# Altium PCB drac_v3_panel.PcbDoc
Units mm, origin at the board's own origin, x right, y up, seen from the top; angles counter-clockwise.
Board outline 192 x 259.5 mm, 6 copper layers (Top Layer, Mid Layer 1_gnd, Mid Layer 2, Mid Layer 3, Mid Layer 4_gnd, Bottom Layer), stack 1.597 mm thick; 17 components, 0 nets, 93 pads, 0 vias.
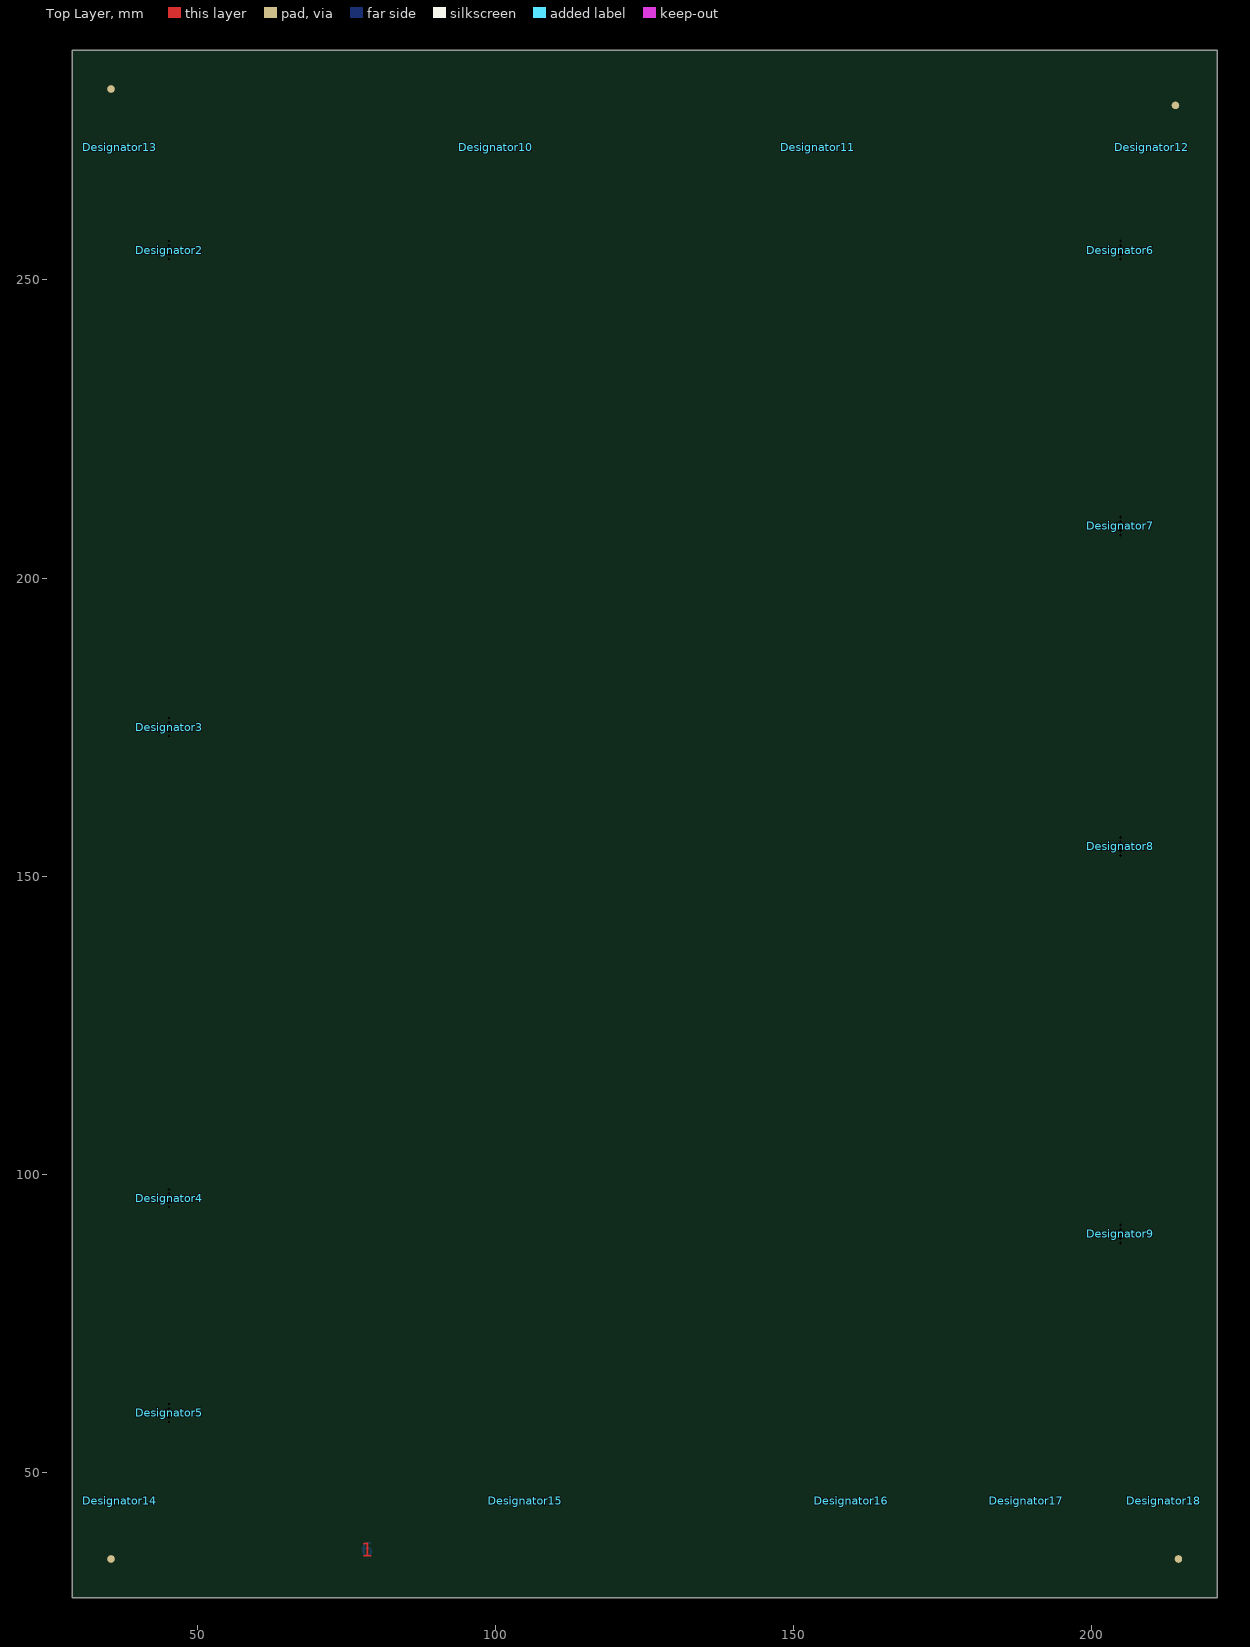
[diagram p0: Top Layer view]
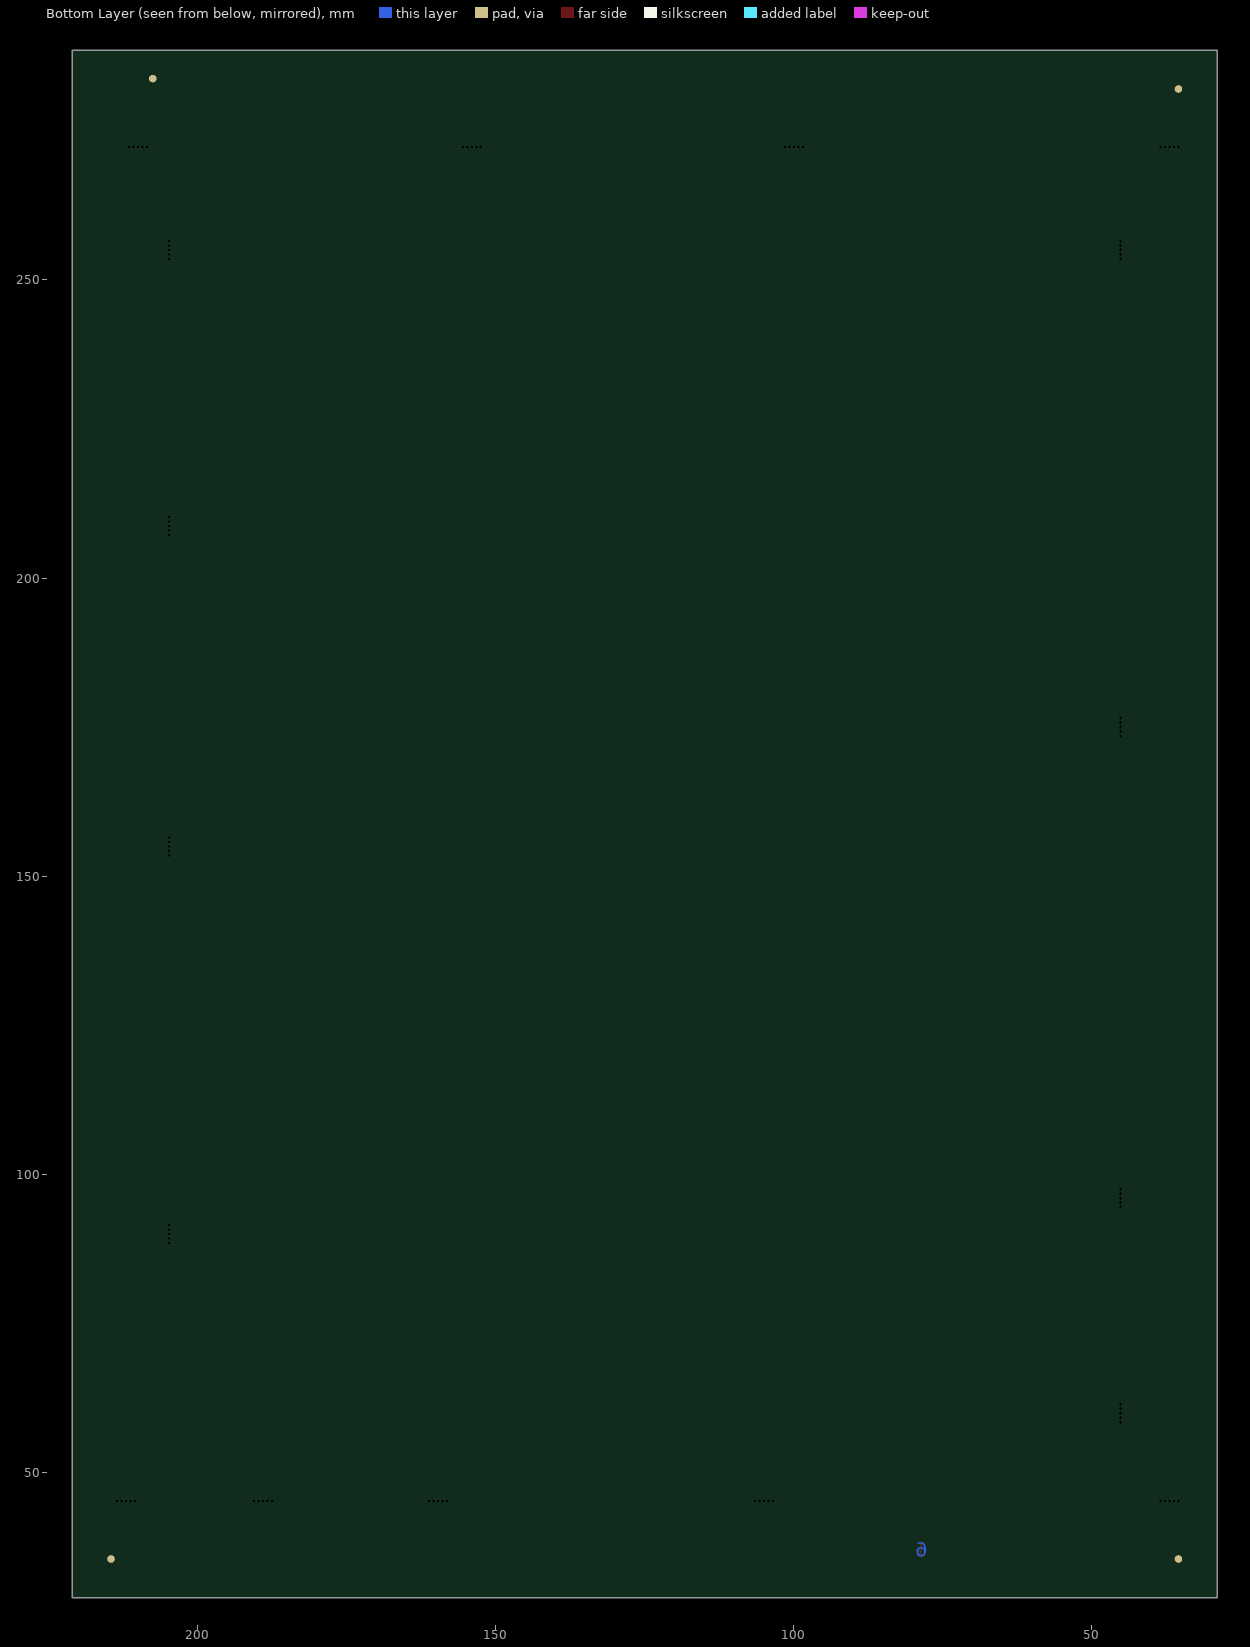
[diagram p1: Bottom Layer view, seen from below]
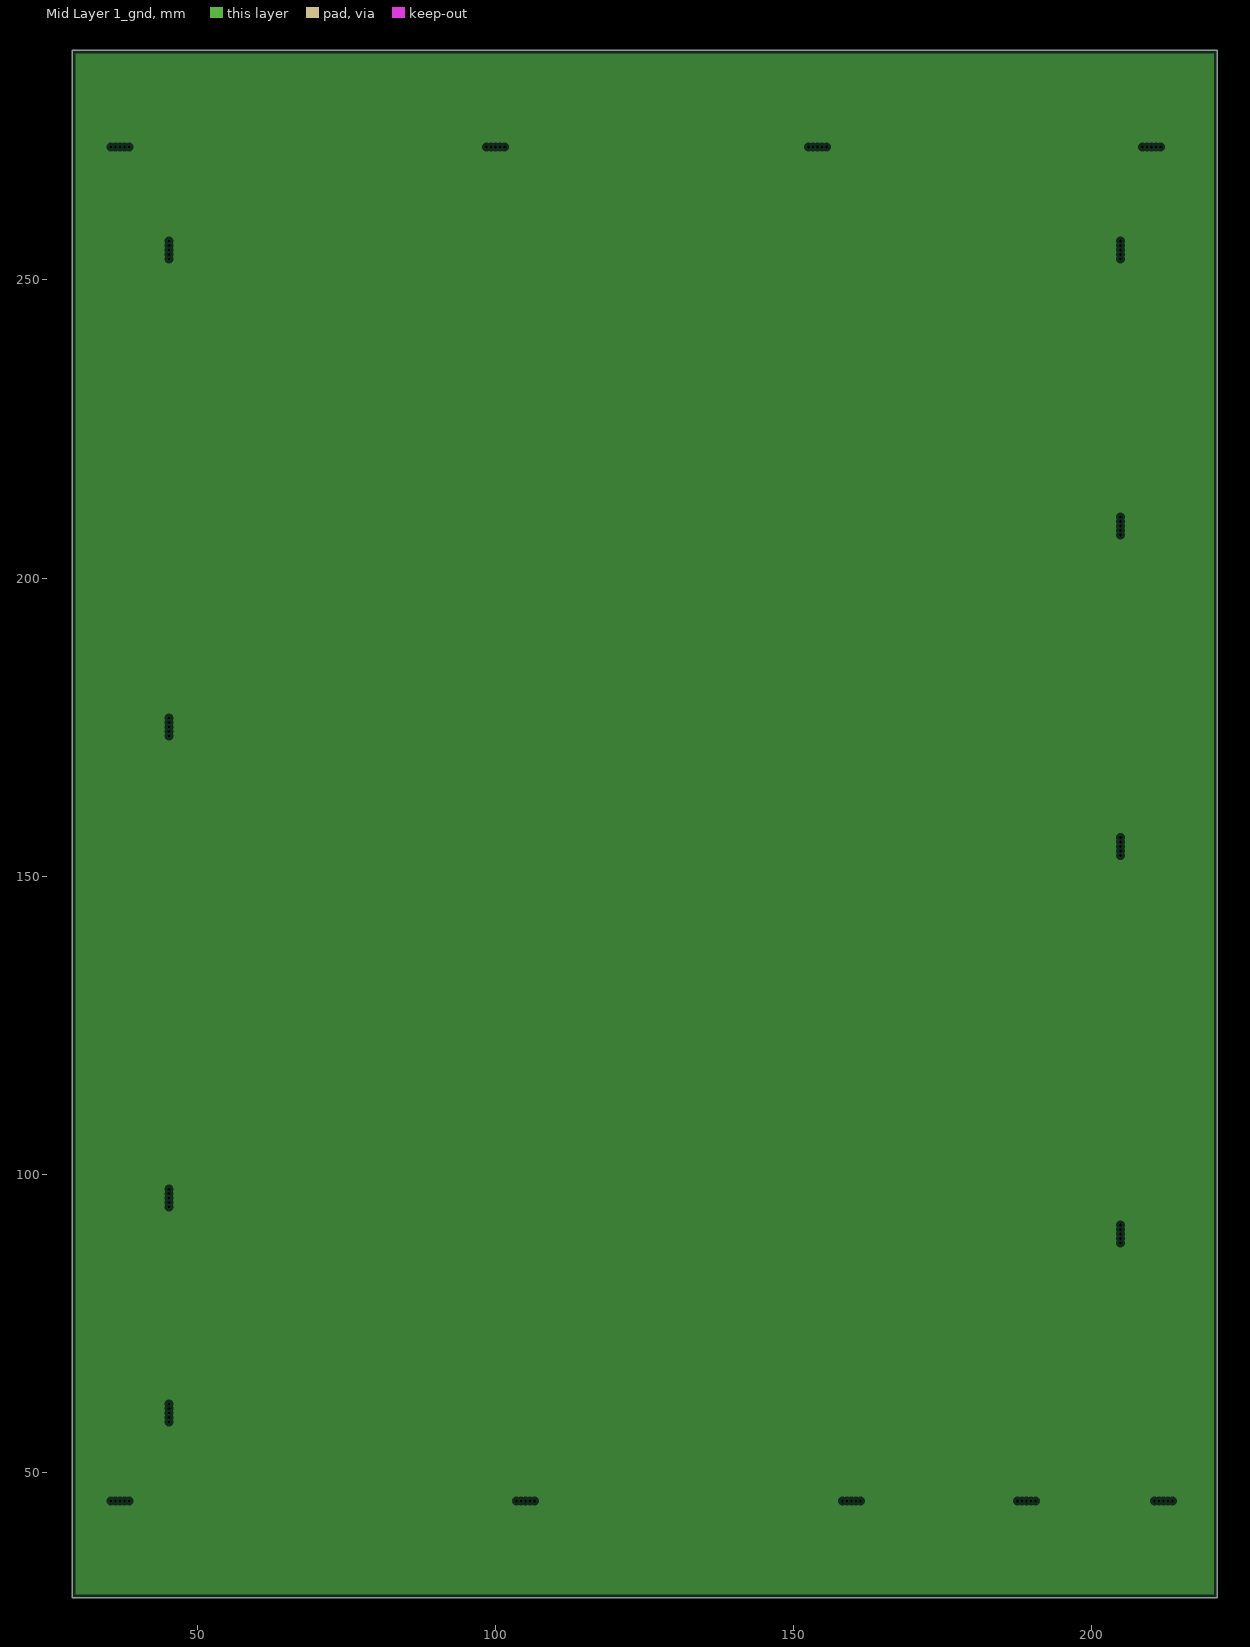
[diagram p2: Mid Layer 1_gnd, clearances drawn from the general rule]
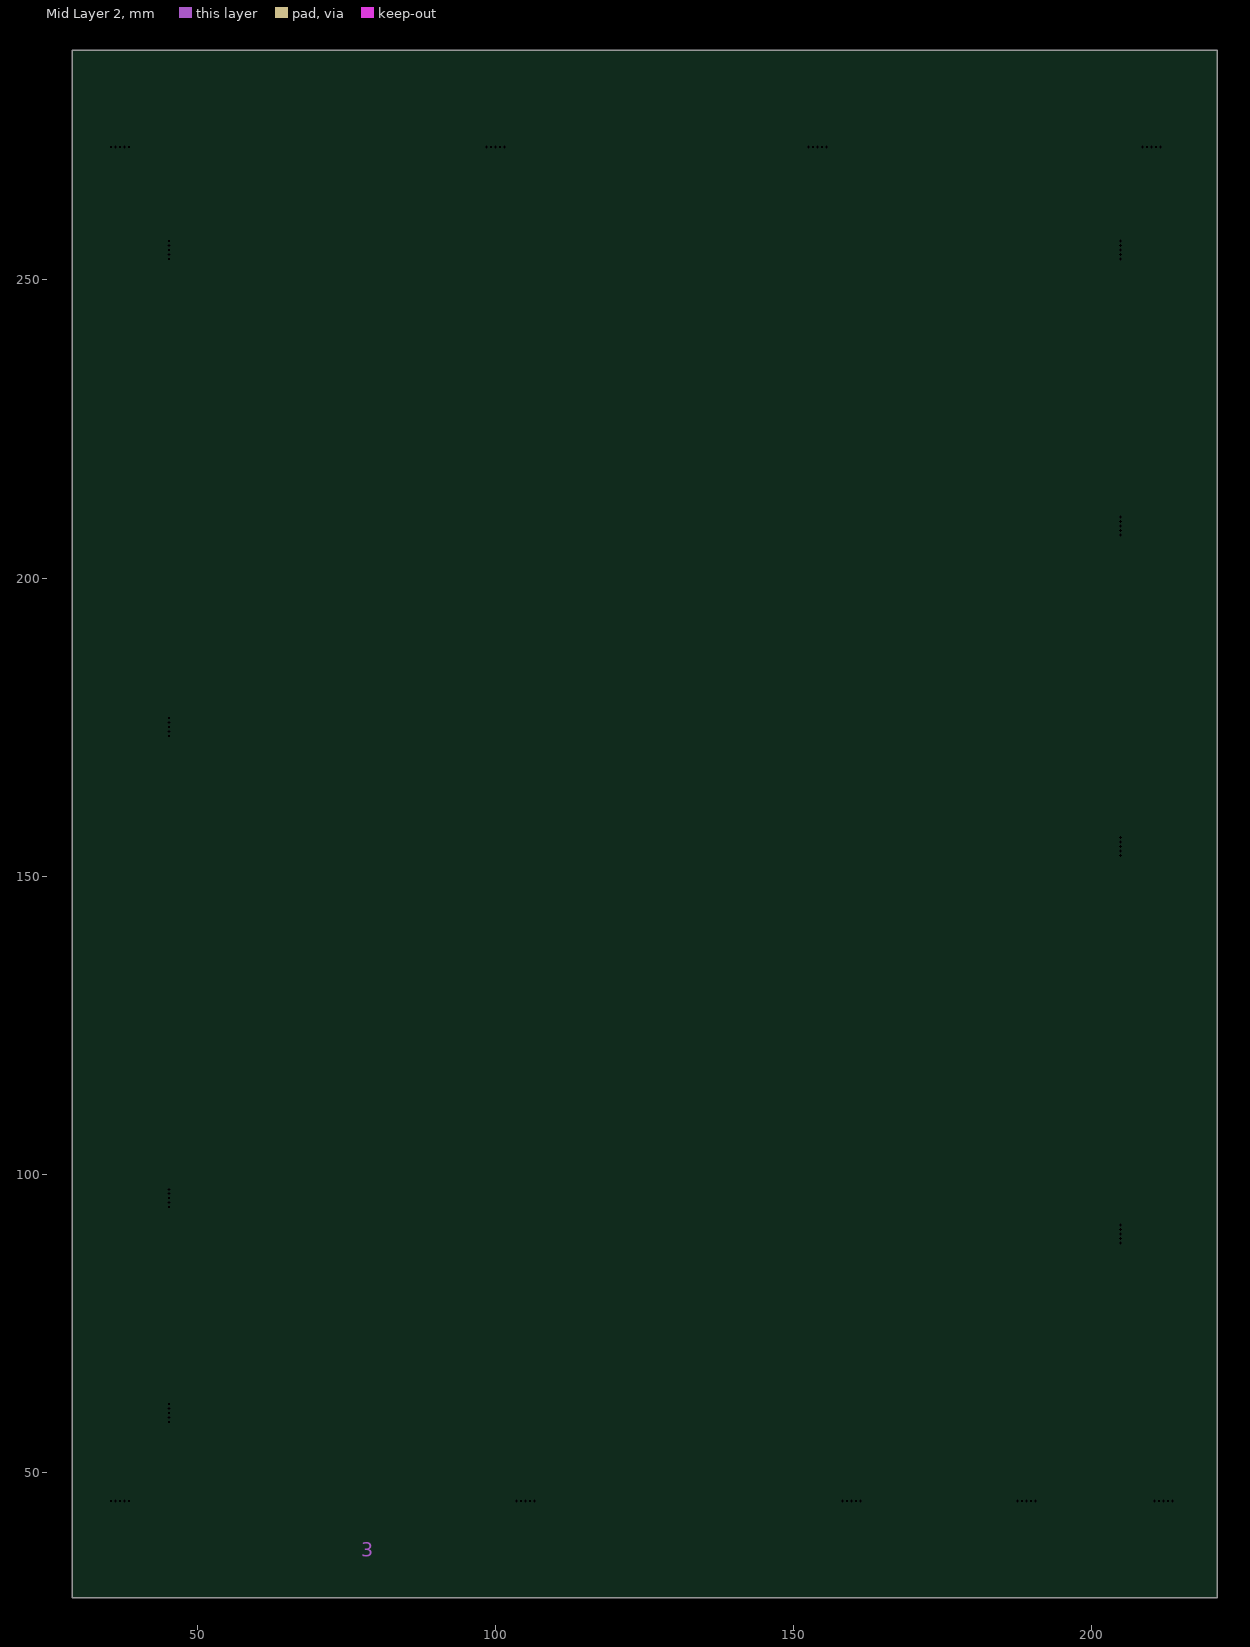
[diagram p3: Mid Layer 2]
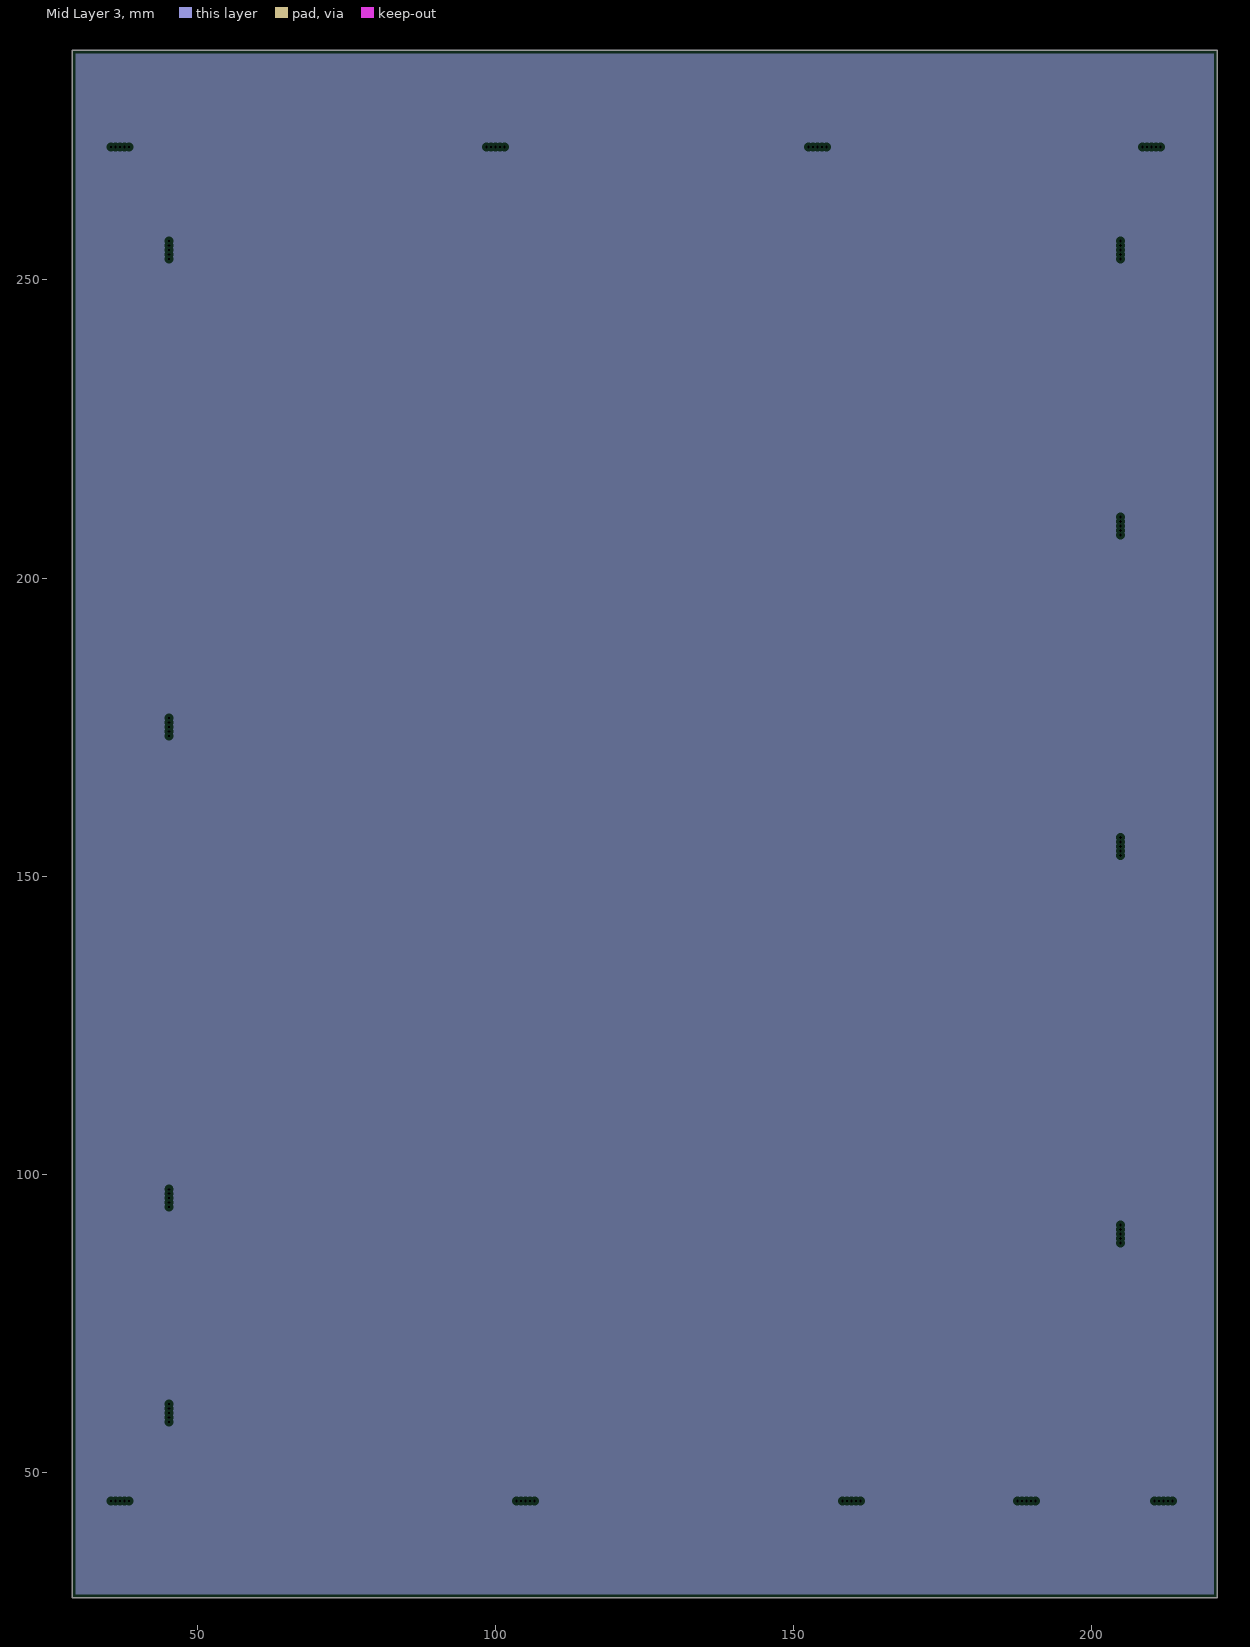
[diagram p4: Mid Layer 3, clearances drawn from the general rule]
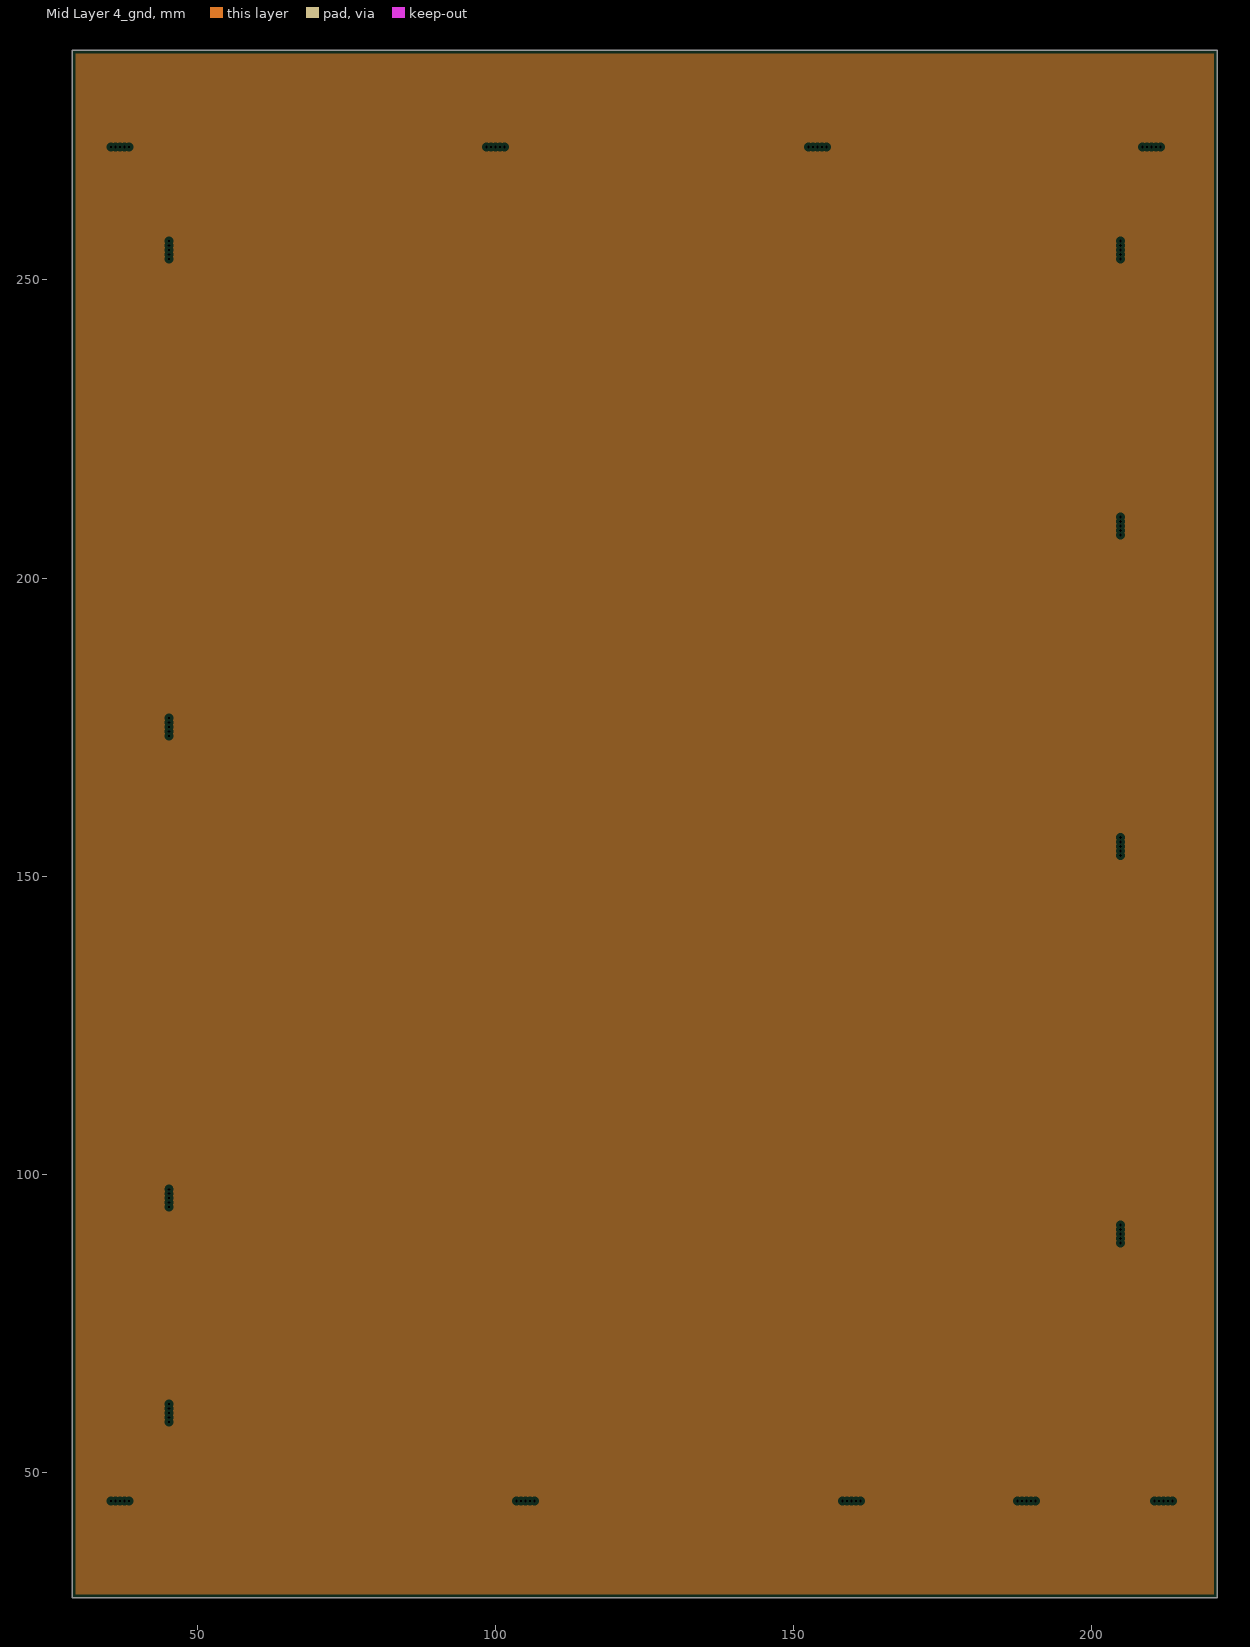
[diagram p5: Mid Layer 4_gnd, clearances drawn from the general rule]

## Layer stack, top to bottom
Top Solder: solder mask 0.0127, Solder Resist, Dk 3.8
Top Layer: signal copper 0.035
Dielectric 1: prepreg 0.1, 2313, Dk 4.05
Mid Layer 1_gnd: plane copper 0.0175
Dielectric 2: core 0.565, Core, Dk 4.5
Mid Layer 2: signal copper 0.0175
Dielectric 3: prepreg 0.127, 2116, Dk 4.25
Mid Layer 3: plane copper 0.0175
Dielectric 4: core 0.565, Core, Dk 4.5
Mid Layer 4_gnd: plane copper 0.0175
Dielectric 5: prepreg 0.1, 2313, Dk 4.05
Bottom Layer: signal copper 0.035
Bottom Solder: solder mask 0.0127, Solder Resist, Dk 3.8

## Board outline
29,29 29,288.5 221,288.5 221,29

## Design rules (kind name [scope] priority, off if disabled: settings)
Clearance [All] p1: gap=0.254 ignorepadtopadclearanceinfootprint=FALSE except(0: Arc-Hole Track-Hole SMDPad-Hole THPad-Hole Via-Hole Fill-Hole Poly-Hole Region-Hole Text-Hole)
HoleToHoleClearance HoleToHoleClearance_1 [HasFootprint('MOUSEBITE_2.5MM_5MM')] p1: gap=0.25 allowstackedmicrovias=TRUE
HoleToHoleClearance [All] p2: gap=0.254 allowstackedmicrovias=TRUE
PlaneClearance [All] p1: clearance=0.508
PlaneConnect [All] p1: planeconnectstyle=Relief reliefexpansion=0.508 reliefentries=4 reliefconductorwidth=0.254 reliefairgap=0.254
PolygonConnect [All] p1: connectstyle=Relief reliefconductorwidth=0.254 reliefentries=4 polygonreliefangle="90 Angle" airgapwidth=0.254
RoutingVias [All] p1: holewidth=0.711 width=1.27 viastyle="Through Hole" minholewidth=0.711 minwidth=1.27 maxholewidth=0.711 maxwidth=1.27
SolderMaskExpansion [All] p1: expansion=0.102 istentingtop=FALSE
Width [All] p1: maxlimit=0.254 minlimit=0.254 preferedwidth=0.254
27 further rules are at their usual default settings.

## Components (designator, comment, footprint, x,y, rotation, side; value= is the part's Value field where it differs from the comment)
Designator2 "Comment" MOUSEBITE_2.5MM_5MM 45.25,255 r0 top
Designator3 "Comment" MOUSEBITE_2.5MM_5MM 45.25,175 r0 top
Designator4 "Comment" MOUSEBITE_2.5MM_5MM 45.25,96 r0 top
Designator5 "Comment" MOUSEBITE_2.5MM_5MM 45.25,60 r0 top
Designator6 "Comment" MOUSEBITE_2.5MM_5MM 204.75,255 r180 top
Designator7 "Comment" MOUSEBITE_2.5MM_5MM 204.75,208.75 r180 top
Designator8 "Comment" MOUSEBITE_2.5MM_5MM 204.75,155 r180 top
Designator9 "Comment" MOUSEBITE_2.5MM_5MM 204.75,90 r180 top
Designator10 "Comment" MOUSEBITE_2.5MM_5MM 100,272.25 r270 top
Designator11 "Comment" MOUSEBITE_2.5MM_5MM 154,272.25 r270 top
Designator12 "Comment" MOUSEBITE_2.5MM_5MM 210,272.25 r270 top
Designator13 "Comment" MOUSEBITE_2.5MM_5MM 37,272.25 r270 top
Designator14 "Comment" MOUSEBITE_2.5MM_5MM 37,45.25 r90 top
Designator15 "Comment" MOUSEBITE_2.5MM_5MM 105,45.25 r90 top
Designator16 "Comment" MOUSEBITE_2.5MM_5MM 159.654,45.25 r90 top
Designator17 "Comment" MOUSEBITE_2.5MM_5MM 189,45.25 r90 top
Designator18 "Comment" MOUSEBITE_2.5MM_5MM 212,45.25 r90 top

## Footprints (in the part's own frame and the unit in brackets; to place one, negate y for a bottom-side part, rotate by r counter-clockwise, add the part's x,y. Pads: shape width x height; smd on the part's side, far side on the other; paste and mask are expansions set on the pad)
MOUSEBITE_2.5MM_5MM [mm]
  round 0 hole 0.5 unplated mask+0.102: 0(0,-1.5) 0(0,-0.75) 0(0,0) 0(0,0.75) 0(0,1.5)

## Free pads (board coordinates)
  round 1.27 smd paste-0.635 mask+1.27: 0(35.5,35.5) 0(35.5,282) 0(214,279.25) 0(214.5,35.5)
  round 1.27 smd far side paste-0.635 mask+1.27: 0(35.5,35.5) 0(35.5,282) 0(207.5,283.75) 0(214.5,35.5)

## Nets (pads, with @x,y where several pads share a name; then routed paths per layer and width w, separated by ;. In a path a pad name is that pad's centre, name@x,y a point inside that pad or via, vN(x,y) a via of type N, cw(c..) or ccw(c..) an arc to the next point about the centre after c; other vN are vias at no path point)
pads on no net: Designator2.0 Designator3.0 Designator4.0 Designator5.0 Designator6.0 Designator7.0 Designator8.0 Designator9.0 Designator10.0 Designator11.0 Designator12.0 Designator13.0 Designator14.0 Designator15.0 Designator16.0 Designator17.0 Designator18.0

## Polygon pours and split planes (outlines as drawn)
no net on Mid Layer 1_gnd (split plane): 220.49,29.51 29.51,29.51 29.51,287.99 220.49,287.99
no net on Mid Layer 3 (split plane): 220.49,29.51 29.51,29.51 29.51,287.99 220.49,287.99
no net on Mid Layer 4_gnd (split plane): 220.49,29.51 29.51,29.51 29.51,287.99 220.49,287.99

## Other copper
Top Layer:
  text "1" at 77.5,35 h4
Mid Layer 2:
  text "3" at 77.5,35 h4
Bottom Layer:
  text "6" at 77.5,35 h4
Mid Layer 1_gnd (plane layer: these items are gaps in the copper):
  text "2" at 77.5,35 h4
Mid Layer 4_gnd (plane layer: these items are gaps in the copper):
  text "5" at 77.5,35 h4
Mid Layer 3 (plane layer: these items are gaps in the copper):
  text "4" at 77.5,35 h4

## Silkscreen, mask and mechanical layers (free items; w line width, h text height)
Route Tool Path (Mech7):
  lines w0.2: 29,29 221,29 221,288.5 29,288.5 29,29
  lines w2.5: 29,273.75 34.5,273.75 ; 29.003,43.75 34.5,43.75 ; 39.5,43.75 55.003,43.75 ; 39.5,273.75 55,273.75 ; 43.75,57.5 43.75,55 ccw(c55,55) 55,43.75 102.5,43.75 ; 43.75,62.5 43.75,93.5 ; 43.75,98.5 43.75,172.5 ; 43.75,177.5 43.75,252.5 ; 43.75,257.5 43.75,262.5 ; 97.5,273.75 55,273.75 ; 102.5,273.75 151.5,273.75 ; 107.5,43.75 157.154,43.75 ; 156.5,273.75 195,273.75 ; 162.154,43.75 186.5,43.75 ; 191.5,43.75 195,43.75 ; 194.997,43.75 209.5,43.75 ; 194.997,273.75 207.5,273.75 ; 206.25,87.5 206.25,55 ; 206.25,92.5 206.25,152.5 ; 206.25,158 206.25,206.25 ; 206.25,211.25 206.25,222.5 206.25,252.75 ; 206.25,257.5 206.25,262.5 ; 212.5,273.75 220.997,273.75 ; 214.5,43.75 220.997,43.75 ; 43.75,262.5 cw(c55,262.5) 54.997,273.75 ; 43.75,262.5 43.75,262.5 ; 43.75,262.5 43.75,262.5 ; 54.997,273.75 cw(c55,272.5) 55,273.75 ; 54.997,273.75 cw(c55,262.5) 55,273.75 ; 195,43.75 ccw(c195,55) 206.25,55 ; 195,43.75 195,43.75 ; 195,273.75 cw(c195,262.5) 195.003,273.75 ; 195,273.75 cw(c195,272.5) 195.003,273.75 ; 195.003,273.75 cw(c195,262.5) 206.25,262.503 ; 206.25,55 206.25,55 ; 206.25,262.5 ccw(c205,262.5) 206.25,262.503 ; 206.25,262.5 ccw(c195,262.5) 206.25,262.503

## Panel: embedded boards
"drac_v3.PcbDoc" at 45,45, 1 rows x 1 columns, spacing 63.5 x 38.1, rotation 0